# Altium PCB PW1555.PcbDoc
Units mil, origin at the board's own origin, x right, y up, seen from the top; angles counter-clockwise.
Board outline 1968.5 x 1181.1 mil, 2 copper layers (Top Layer, Bottom Layer); 17 components, 7 nets, 44 pads, 61 vias.
Unrouted connection lines stored in the file: 12.
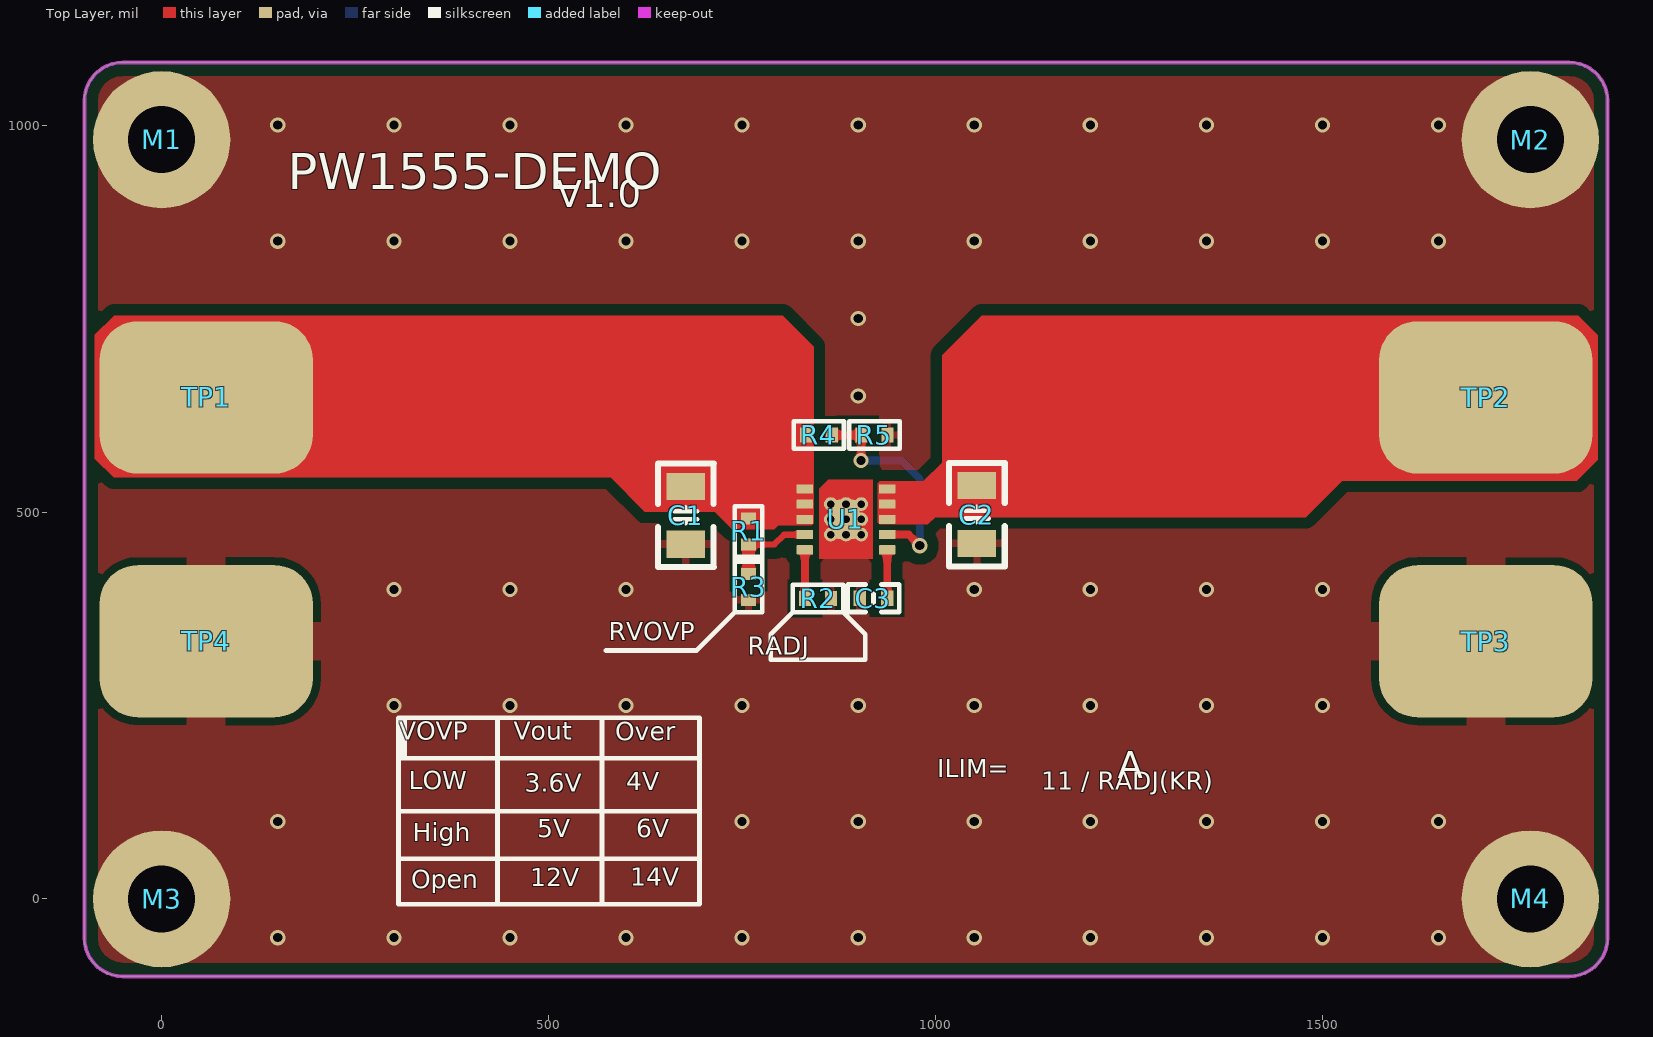
[diagram p0: Top Layer view]
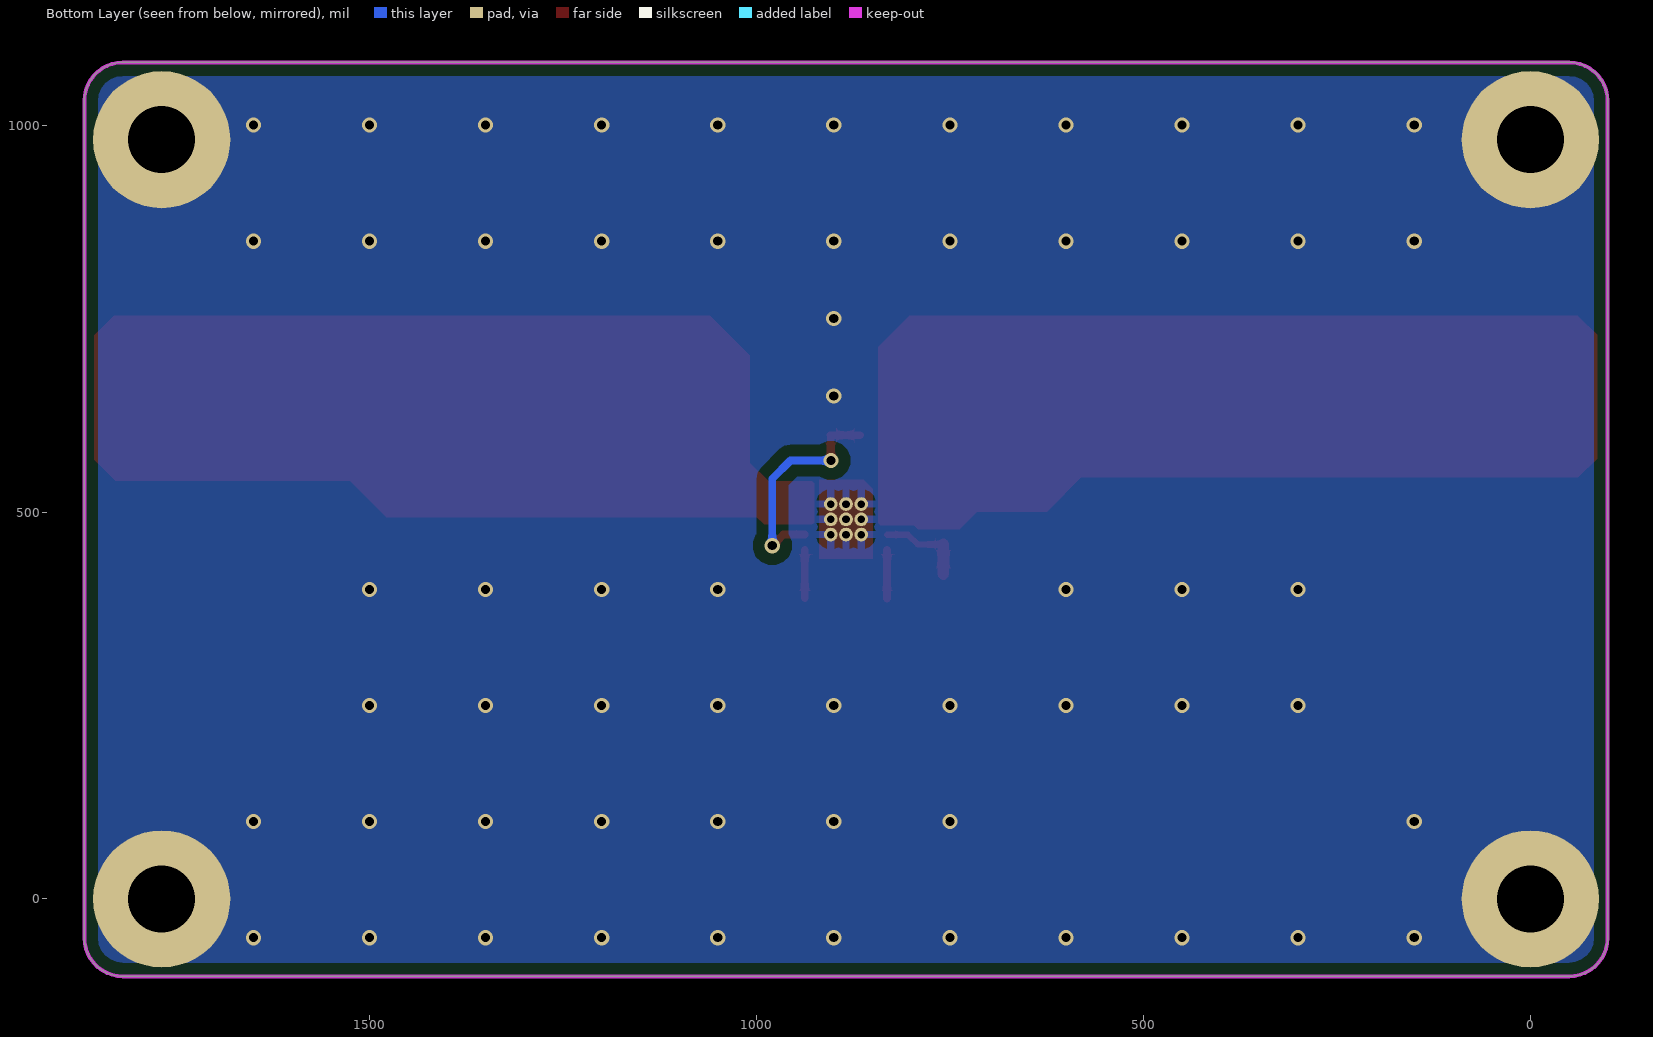
[diagram p1: Bottom Layer view, seen from below]
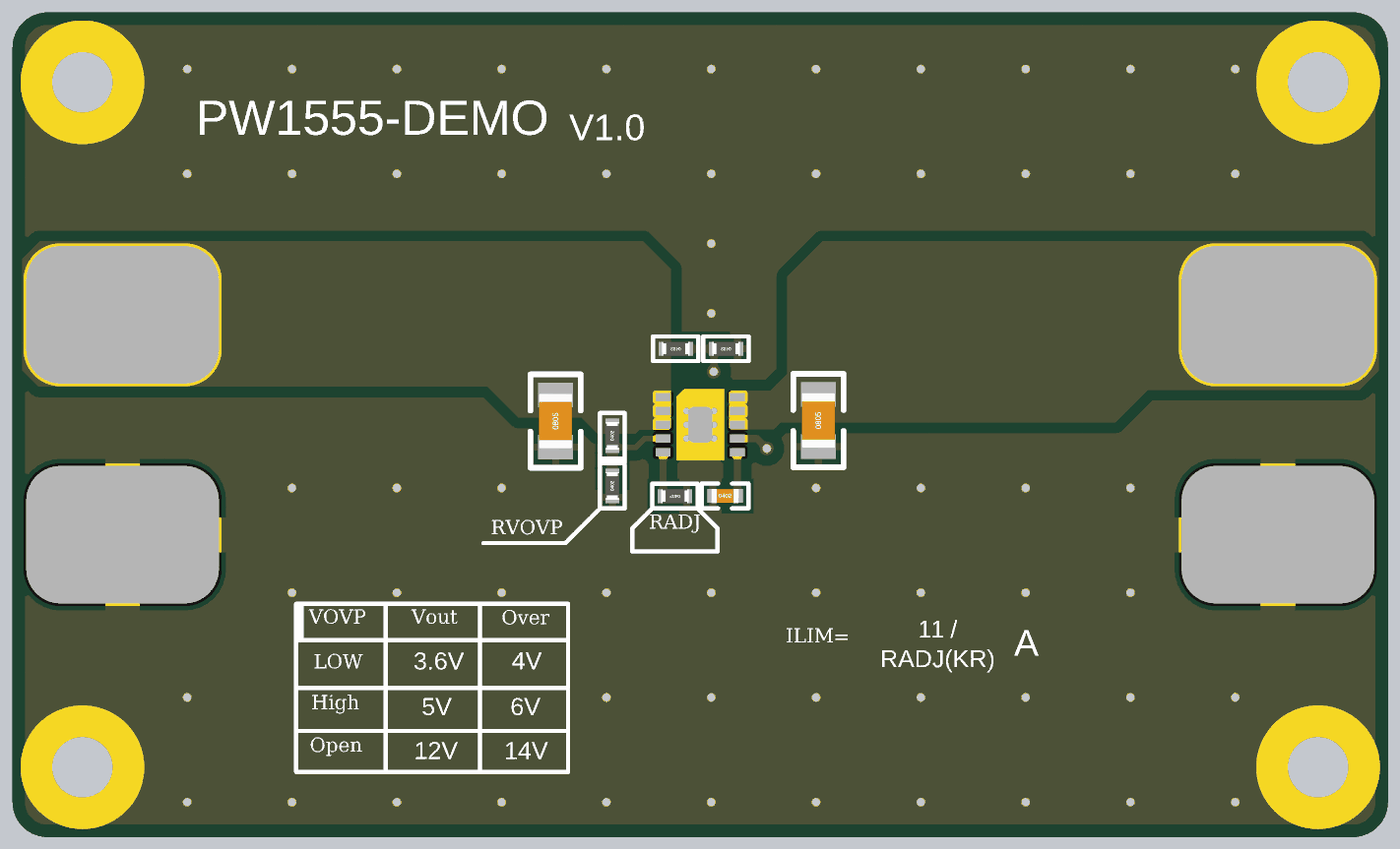
[diagram p2: 3D render of the assembled board from above, using the file's embedded part models]

## Layer stack, top to bottom
Top Solder: solder mask 0.4, Solder Resist, Dk 3.5
Top Layer: signal copper 1.4
Dielectric 1: dielectric 12.6, FR-4, Dk 4.8
Bottom Layer: signal copper 1.4
Bottom Solder: solder mask 0.4, Solder Resist, Dk 3.5

## Board outline
-100,-50 -100,1031.1 cw(c-50,1031.1) -50,1081.1 1818.5,1081.1 cw(c1818.5,1031.1) 1868.5,1031.1 1868.5,-50 cw(c1818.5,-50) 1818.5,-100 -50,-100 cw(c-50,-50)

## Design rules (kind name [scope] priority, off if disabled: settings)
Clearance Clearance_1 [InPolygon] p1: gap=15 ignorepadtopadclearanceinfootprint=FALSE
Clearance [All] p2: gap=6 ignorepadtopadclearanceinfootprint=FALSE
HoleToHoleClearance [All] p1: gap=0 allowstackedmicrovias=TRUE
MinimumSolderMaskSliver [All] p1: minsoldermaskwidth=0
PolygonConnect M2 [HasFootprint('M2焊盘')] p1: connectstyle=Direct reliefconductorwidth=10 reliefentries=4 polygonreliefangle="90 Angle" airgapwidth=10
PolygonConnect PAD [HasFootprint('PAD_5x5')] p2: thpad.connectstyle=Relief thpad.reliefconductorwidth=10 thpad.reliefentries=4 thpad.polygonreliefangle="90 Angle" thpad.airgapwidth=10 smdpad.connectstyle=Relief smdpad.reliefconductorwidth=50 smdpad.reliefentries=4 smdpad.polygonreliefangle="90 Angle" smdpad.airgapwidth=10 via.connectstyle=Direct via.reliefconductorwidth=10 via.reliefentries=4 via.polygonreliefangle="90 Angle" via.airgapwidth=10
PolygonConnect [All] p3: thpad.connectstyle=Relief thpad.reliefconductorwidth=10 thpad.reliefentries=4 thpad.polygonreliefangle="90 Angle" thpad.airgapwidth=10 smdpad.connectstyle=Relief smdpad.reliefconductorwidth=10 smdpad.reliefentries=4 smdpad.polygonreliefangle="90 Angle" smdpad.airgapwidth=10 via.connectstyle=Direct via.reliefconductorwidth=10 via.reliefentries=4 via.polygonreliefangle="90 Angle" via.airgapwidth=10
RoutingVias [All] p1: holewidth=9.84 width=17.72 viastyle="Through Hole" minholewidth=9.84 minwidth=17.72 maxholewidth=23.62 maxwidth=31.5
SilkToSilkClearance [All] p1: silktosilkclearance=0
SilkToSolderMaskClearance [IsPad] p1: minsilkscreentomaskgap=0 clearancetoexposedcopper=TRUE
SolderMaskExpansion [IsVia] p1: expansion=4 istentingtop=TRUE useseparateexpansions=TRUE expansionbottom=4 istentingbottom=TRUE
Width [All] p1: maxlimit=50 minlimit=6 preferedwidth=6
26 further rules are at their usual default settings.

## Classes and differential pairs
component class PAD: TP1 TP2 TP3 TP4
component class M2: M1 M2 M3 M4

## Components (designator, comment, footprint, x,y, rotation, side; value= is the part's Value field where it differs from the comment)
C1 "10uF/25V" C0805_L 677.23,495.77 r90 top
C2 "10uF/25V" C0805_L 1053.37,496.61 r90 top
C3 "0.1uF/50V" C0402_L 919.77,388.57 r0 top
M1 "M2" M2焊盘 0,981.1 r0 top
M2 "M2" M2焊盘 1768.5,981.1 r0 top
M3 "M2" M2焊盘 0,0 r0 top
M4 "M2" M2焊盘 1768.5,0 r0 top
R1 "100K/1%/NC" R0402_L 758.37,474.85 r90 top
R2 "3.1K/1%" R0402_L 848.09,388.35 r180 top
R3 "NC/100K/1%" R0402_L 758.37,403.12 r90 top
R4 "NC/10K/1%" R0402_L 849.1,599.36 r180 top
R5 "10K/1%/NC" R0402_L 921.06,599.36 r180 top
TP1 "TEST" PAD_5x5 57.48,648.03 r0 top locked
TP2 "TEST" PAD_5x5 1711.02,648.03 r0 top locked
TP3 "TEST" PAD_5x5 1711.02,333.07 r0 top locked
TP4 "TEST" PAD_5x5 57.48,333.07 r0 top locked
U1 "PW1555" DFN3x3-10 884.25,490.55 r0 top locked

## Footprints (in the part's own frame and the unit in brackets; to place one, negate y for a bottom-side part, rotate by r counter-clockwise, add the part's x,y. Pads: shape width x height; smd on the part's side, far side on the other; paste and mask are expansions set on the pad)
C0402_L [mm] "无极性贴片电容"
  rect 0.4x0.5 smd: 1(-0.45,0) 2(0.45,0)
  silkscreen extent -0.85,-0.45 0.85,0.45, body extent -0.5,-0.26 0.5,0.26, height 0.54
C0805_L [mil] "无极性贴片电容"
  rect 35x50 smd: 1(-37.4,0) 2(37.4,0)
  silkscreen extent -67,-36 67,36, body extent -39,-24 39,24, height 21
DFN3x3-10 [mm]
  rrect20% 0.55x0.3 smd mask+0.102: 1(-1.35,1) 2(-1.35,0.5) 3(-1.35,0) 4(-1.35,-0.5) 5(-1.35,-1) 6(1.35,-1) 7(1.35,-0.5) 8(1.35,0) 9(1.35,0.5) 10(1.35,1)
  round 0.45 hole 0.25 mask+0.102: 11(-0.5,-0.5) 11(-0.5,0) 11(-0.5,0.5) 11(0,-0.5) 11(0,0) 11(0,0.5) 11(0.5,-0.5) 11(0.5,0) 11(0.5,0.5)
  rrect50% 0.875x1.3 smd mask+0.102: 11(0,0)
  Top Layer region: -0.875,-1.3 -0.875,1.005 -0.58,1.3 0.875,1.3 0.875,-1.3
M2焊盘 [mm]
  round 4.5 hole 2.2: 1(0,0)
PAD_5x5 [mm]
  rrect50% 7x5 smd mask+0.102: 1(0,0)
R0402_L [mm] "1/16W贴片电阻"
  rect 0.4x0.5 smd: 1(-0.425,0) 2(0.425,0)
  silkscreen extent -0.82,-0.45 0.83,0.45, body extent -0.5,-0.25 0.5,0.25, height 0.3

## Part data
C1 C2 C3: library part C, "贴片电容", BOM名称=无极性贴片电容, 联系卖家，免费查找封装=唯一出售店铺网址https://shop463601444.taobao.com
M1 M2 M3 M4: library part M2系列, "M2孔支撑柱"
R1 R2 R3 R4 R5: library part R, "贴片电阻", BOM名称=贴片电阻, 联系卖家，免费查找封装=唯一出售店铺网址https://shop463601444.taobao.com
TP1 TP2 TP3 TP4: "测试点", BOM名称=测试点, 封装库来自淘宝卖家ID：黄晶宝石=其他店铺购入均为盗版假冒封装库，请立即申请退款, 联系卖家，免费查找封装=唯一出售店铺网址https://shop463601444.taobao.com
U1: "VOVP  ILIM保护芯片"

## Via types
v1: diameter 19.68, hole 11.81, Top Layer to Bottom Layer, tented both sides, 61 vias

## Nets (pads, with @x,y where several pads share a name; then routed paths per layer and width w, separated by ;. In a path a pad name is that pad's centre, name@x,y a point inside that pad or via, vN(x,y) a via of type N, cw(c..) or ccw(c..) an arc to the next point about the centre after c; other vN are vias at no path point)
GND: C1.1 C2.1 C3.1 M1.1 M2.1 M3.1 M4.1 R2.1 R3.1 R5.1 TP3.1 TP4.1 U1.11
  other v1: 150,-50 300,-50 450,-50 600,-50 750,-50 900,-50 1050,-50 1200,-50 1350,-50 1500,-50 1650,-50 150,100 750,100 900,100 1050,100 1200,100 1350,100 1500,100 1650,100 300,250 450,250 600,250 750,250 900,250 1050,250 1200,250 1350,250 1500,250 300,400 450,400 600,400 1050,400 1200,400 1350,400 1500,400 900,650 900,750 150,850 300,850 450,850 600,850 750,850 900,850 1050,850 1200,850 1350,850 1500,850 1650,850 150,1000 300,1000 450,1000 600,1000 750,1000 900,1000 1050,1000 1200,1000 1350,1000 1500,1000 1650,1000
NetC3_2: C3.2 U1.6 | length 62.7
  Top Layer w10: U1.6 937.44,451.14 937.44,388.6 C3.2
NetR1_1: R1.1 R3.2 U1.4 | length 116.1
  Top Layer w8: R1.1 791.53,458.12 804.15,470.74 U1.4@830.98,470.74
  Top Layer w15: R3.2 R1.1
NetR2_2: R2.2 U1.5 | length 62.9
  Top Layer w10: U1.5 831.23,451.05 831.23,388.48 R2.2
PW1555_EN: R4.1 R5.2 U1.7 | length 291.9
  Top Layer w10: R4.1 R5.2 903.92,598.94 903.92,566.96 v1(903.5,566.55) ; U1.7 965.19,470.87 v1(979.5,456.55)
  Bottom Layer w10: v1(903.5,566.55) 956,566.55 979.5,543.05 v1(979.5,456.55)
VCC_IN: C1.2 R1.2 R4.2 TP1.1 U1.1 U1.2 U1.3
VCC_OUT: C2.2 TP2.1 U1.8 U1.9 U1.10

## Polygon pours and split planes (outlines as drawn)
GND on Top Layer "GND_L01_P000" (solid, remove dead copper, pour order 0): -105,1087 -105,-104 1875,-104 1875,1087
GND on Bottom Layer "GND_L02_P001" (solid, remove dead copper, pour order 1): -105,1087 -105,-104 1875,-104 1875,1087

## Keep-outs
Keep-Out Layer:
  lines w5: -100,-50 ccw(c-50,-50) -50,-100 1818.5,-100 ccw(c1818.5,-50) 1868.5,-50 1868.5,346.1 1868.5,1031.1 ccw(c1818.5,1031.1) 1818.5,1081.1 -50,1081.1 ccw(c-50,1031.1) -100,1031.1 -100,851.1 -100,-50

## Other copper
Top Layer:
  region net VCC_OUT: 925.22,486.36 927.67,483.91 989.87,483.91 999.5,493.55 1478.5,493.55 1525.5,540.55 1828.7,540.55 1855.5,567.35 1855.5,728.55 1830.5,753.55 1059.5,753.55 1008.5,702.55 1008.5,563.99 984.07,539.55 927.91,539.55 925.22,536.87
  region net VCC_IN: -62.17,544.99 -86.28,569.11 -86.28,728.76 -61.5,753.55 802.5,753.55 842.39,713.67 842.39,485.67 839.76,483.04 797,483.04 791.5,477.55 737.5,477.55 714.5,500.55 624.5,500.55 580.06,544.99

## Silkscreen, mask and mechanical layers (free items; w line width, h text height)
Top Overlay:
  lines w6: 306,52 695,52 ; 306,113.5 695,113.5 ; 306,182 695,182 ; 310.73,182.37 310.73,234 311.06,234 ; 313.64,182.26 313.64,234 311.06,234 ; 434,-7 434,234 ; 569,-6 569,233 ; 574,321 691.01,321 740.65,370.64 ; 740.84,438.94 775.5,438.94 ; 306,234 311.06,234 ; 306,234 695,234 695,-7 306,-7 306,234 ; 740.65,370.64 776.08,370.64 776.08,507.33 740.65,507.33 740.65,370.64 ; 815.61,370.64 787,342.03 787,309 909,309 909,342.21 880.57,370.64 ; 815.61,370.64 815.61,406.07 ; 815.61,370.64 880.57,370.64 ; 815.61,370.64 815.61,406.07 ; 815.61,406.07 880.57,406.07 880.57,370.64
  text "PW1555-DEMO" at 162.89,901.53 h80
  text "V1.0" at 510.52,881.89 h60
  text "RVOVP" at 577.95,326.26 h40
  text "RADJ" at 757.45,307.72 h40
  text "VOVP" at 306.95,198.26 h40
  text "Vout" at 454.92,198.26 h40
  text "Over" at 585.79,197.26 h40
  text "ILIM=" at 1002.17,149.21 h40
  text "A" at 1235.53,144.39 h60
  text "LOW" at 319.08,134.26 h40
  text "11 / RADJ(KR)" at 1136.43,133.13 h40
  text "4V" at 600.17,132.42 h40
  text "3.6V" at 469.16,130.74 h40
  text "5V" at 485.52,72.01 h40
  text "6V" at 612.98,71.97 h40
  text "High" at 324.67,66.92 h40
  text "12V" at 476.32,8.97 h40
  text "14V" at 605.32,9.17 h40
  text "Open" at 322.16,5.92 h40
Mechanical 1:
  the board outline again, w5
Mechanical 2:
  circle w5: c0,981.1 r39.37
  circle w5: c0,0 r39.37
  circle w5: c1768.5,981.1 r39.37
  circle w5: c1768.5,0 r39.37
  lines w5: -100,-50 ccw(c-50,-50) -50,-100 1818.5,-100 ccw(c1818.5,-50) 1868.5,-50 1868.5,346.1 1868.5,1031.1 ccw(c1818.5,1031.1) 1818.5,1081.1 -50,1081.1 ccw(c-50,1031.1) -100,1031.1 -100,851.1 -100,-50